# Altium PCB Pulse_WS_MAX30105.PcbDoc
Units mm, origin at the board's own origin, x right, y up, seen from the top; angles counter-clockwise.
Board outline 16.3 x 13 mm, 4 copper layers (Top Layer, Layer 1, Layer 2, Bottom Layer), stack 0.612 mm thick; 9 components, 6 nets, 39 pads, 22 vias.
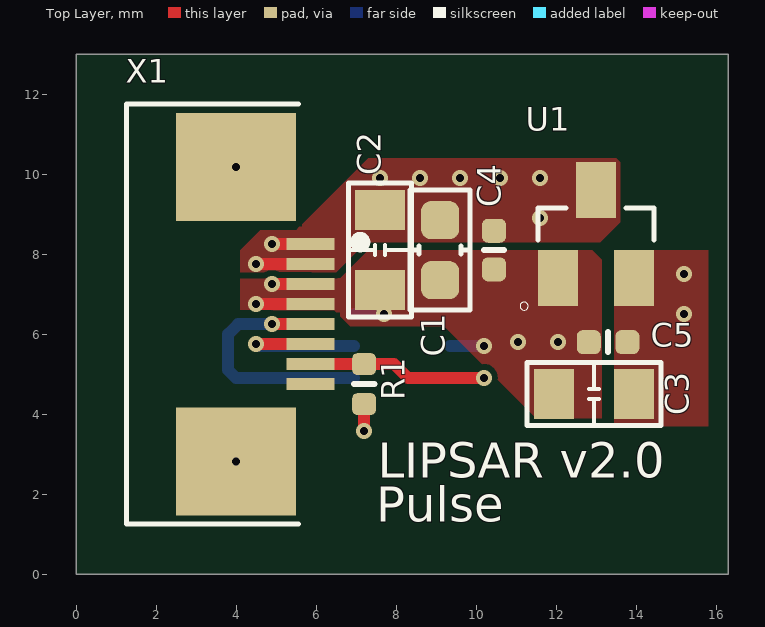
[diagram p0: Top Layer view]
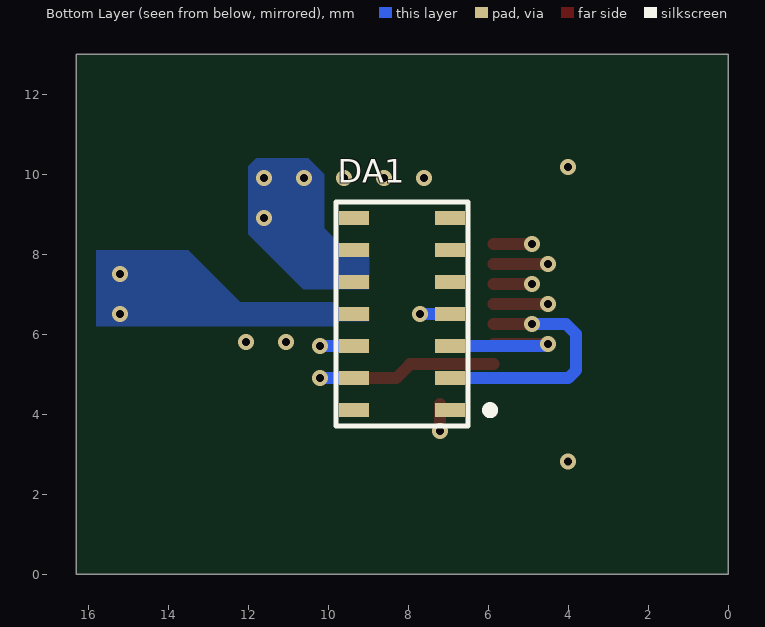
[diagram p1: Bottom Layer view, seen from below]
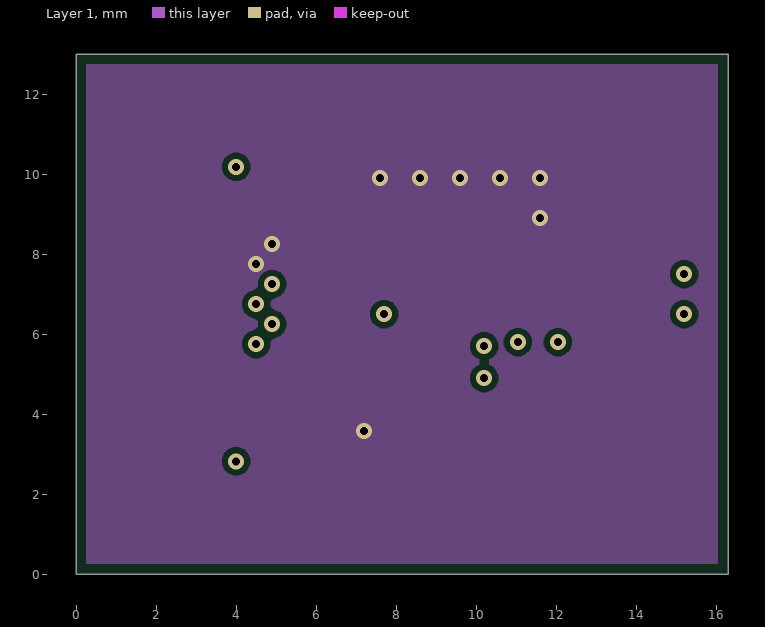
[diagram p2: Layer 1]
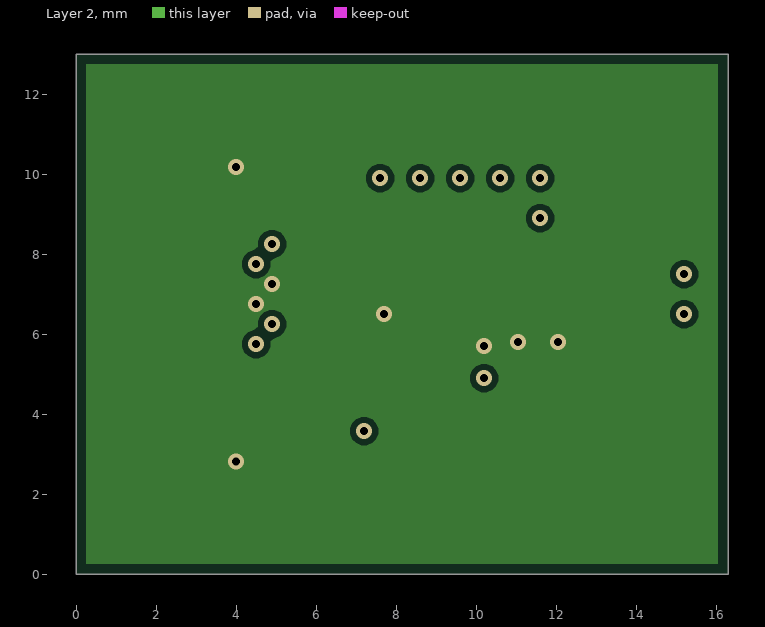
[diagram p3: Layer 2]
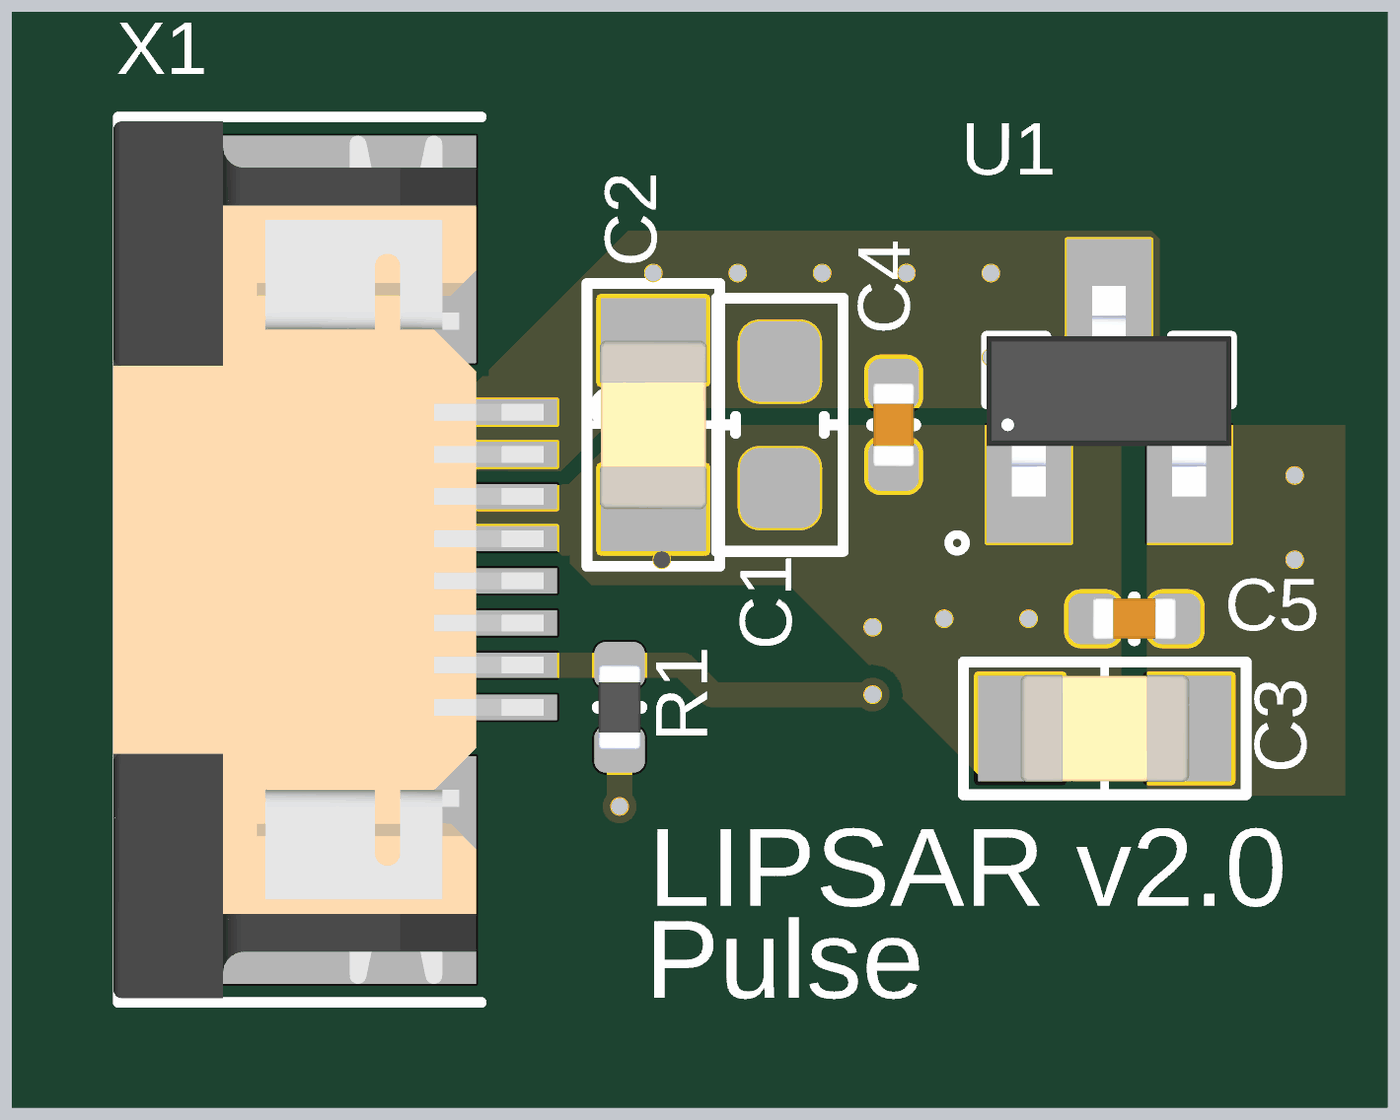
[diagram p4: 3D render of the assembled board from above, using the file's embedded part models]

## Layer stack, top to bottom
Top Solder: solder mask 0.0102, Solder Resist, Dk 3.5
Top Layer: signal copper 0.018
Dielectric 2: prepreg 0.125, FR4_HiTg170 PR, Dk 5.07
Layer 1: signal copper 0.018
Dielectric 1: core 0.29, FR4 HiTg170, Dk 4.5
Layer 2: signal copper 0.018
Dielectric 3: prepreg 0.125, FR4_HiTg170 PR, Dk 5.07
Bottom Layer: signal copper 0.018
Bottom Solder: solder mask 0.0102, Solder Resist, Dk 3.5

## Board outline
0,0 0,13 16.3,13 16.3,0

## Design rules (kind name [scope] priority, off if disabled: settings)
AcuteAngle [All] p1: minimum=3.50000000000000E+0001 checktracksonly=FALSE
BoardOutlineClearance "BoardOutlineClearance 1" [All] p1: gap=0.25 ignorepadtopadclearanceinfootprint=FALSE except(0: Arc-SplitContinuation Track-SplitContinuation SMDPad-SplitContinuation THPad-SplitContinuation Via-SplitContinuation Fill-SplitContinuation Poly-SplitContinuation Region-SplitContinuation Text-SplitContinuation) // Milling
BoardOutlineClearance "BoardOutlineClearance 2" [All] p2: gap=0.4 ignorepadtopadclearanceinfootprint=FALSE except(0: Arc-SplitContinuation Track-SplitContinuation SMDPad-SplitContinuation THPad-SplitContinuation Via-SplitContinuation Fill-SplitContinuation Poly-SplitContinuation Region-SplitContinuation Text-SplitContinuation) // V-Cut
Clearance "Clearance-2 1/2 Oz" [All] p1: gap=0.1 ignorepadtopadclearanceinfootprint=FALSE except(0.15: Arc-Fill Arc-Poly Track-Fill Track-Poly SMDPad-SMDPad SMDPad-Fill SMDPad-Poly THPad-Fill THPad-Poly Via-Fill Via-Poly Fill-Fill Fill-Poly Poly-Poly Poly-Region Poly-Text; 0.25: Arc-Hole Track-Hole SMDPad-Hole THPad-Hole Via-Hole Fill-Hole Poly-Hole Region-Hole Text-Hole) // Advance
DiffPairsRouting "DiffPairsRouting 1 Oz" [All] p1: maxlimit=0.254 minlimit=0.2 mostfreqgap=0.254 toplayer_minwidth=0.2 toplayer_maxwidth=0.381 toplayer_prefwidth=0.381 midlayer1_minwidth=0.2 midlayer1_maxwidth=0.381 midlayer1_prefwidth=0.381 midlayer2_minwidth=0.2 midlayer2_maxwidth=0.381 midlayer2_prefwidth=0.381 bottomlayer_minwidth=0.2 bottomlayer_maxwidth=0.381 bottomlayer_prefwidth=0.381 maxuncoupledlength=12.7
DiffPairsRouting "DiffPairsRouting 1/2 Oz" [All] p2: maxlimit=0.254 minlimit=0.1 mostfreqgap=0.254 toplayer_minwidth=0.1 toplayer_maxwidth=0.381 toplayer_prefwidth=0.381 midlayer1_minwidth=0.1 midlayer1_maxwidth=0.381 midlayer1_prefwidth=0.381 midlayer2_minwidth=0.1 midlayer2_maxwidth=0.381 midlayer2_prefwidth=0.381 bottomlayer_minwidth=0.1 bottomlayer_maxwidth=0.381 bottomlayer_prefwidth=0.381 maxuncoupledlength=12.7
HoleSize "Minimum HoleSize" [IsPad] p1: absolutevalues=TRUE maxlimit=5.9 minlimit=0.6 maxpercent=80.000 minpercent=20.000
HoleSize "Minimum HoleSize VIA 2" [IsVia] p2: absolutevalues=TRUE maxlimit=5.9 minlimit=0.2 maxpercent=80.000 minpercent=20.000 // Advance
HoleToHoleClearance Hole2HoleClearance [All] p1: gap=0.25 allowstackedmicrovias=FALSE
MinimumAnnularRing "Minimum AR VIA Standart" [IsVia] p1: minimumring=0.1
MinimumAnnularRing "Minimum AR PAD Standart" [IsPAD] p2: minimumring=0.15
MinimumSolderMaskSliver "SolderMask Bridge Advance" [All] p1: minsoldermaskwidth=0.1 // Mask LDI
PlaneClearance "PlaneClearance-2 1/2 Oz" [All] p1: clearance=0.15 // Advance
PlaneConnect "TermalConnect-2 1/2 Oz" [All] p1: planeconnectstyle=Direct reliefexpansion=0.15 reliefentries=4 reliefconductorwidth=0.15 reliefairgap=0.15 // Advance
PolygonConnect "PolygonConnect-2 1/2 Oz" [All] p1: connectstyle=Direct reliefconductorwidth=0.125 reliefentries=4 polygonreliefangle="90 Angle" airgapwidth=0.15 // Advance
RoutingCorners [All] p1 off: cornerstyle=45-Degree minsetback=2.54 maxsetback=2.54
RoutingVias [All] p1: holewidth=0.2 width=0.4 viastyle="Through Hole" minholewidth=0.2 minwidth=0.4 maxholewidth=5.9 maxwidth=6.4
SilkToSilkClearance Silk2SilkClearance [All] p1 off: silktosilkclearance=0.15
SilkToSolderMaskClearance Silk2SolderMaskClearance [IsPad] p1 off: minsilkscreentomaskgap=0.15 clearancetoexposedcopper=TRUE
SolderMaskExpansion SolderMaskExpansion_via [isvia] p1: expansion=0.102 istentingtop=TRUE
SolderMaskExpansion "SolderMaskExpansion LDI" [All] p2: expansion=0.025 istentingtop=FALSE // Advance
UnRoutedNet [All] p1: checkbadconnections=TRUE
Width Width_SPI [InNet('SPI1_CLK') or InNet('SPI1_CS_FLASH')or InNet('SPI1_CS_TFT')or InNet('SPI1_MISO')or InNet('SPI1_MOSI')] p1: maxlimit=0.16 minlimit=0.14 preferedwidth=0.16 toplayer_minwidth=0.16 midlayer1_maxwidth=0.14 midlayer1_prefwidth=0.14 midlayer2_maxwidth=0.14 midlayer2_prefwidth=0.14 bottomlayer_minwidth=0.16 impedanceprofiledriven=TRUE impedanceprofileid={AFAC0996-0EC3-4B63-996B-75656DEA0BB7} minimp=50.000000 maximp=50.000000 favimp=50.000000
Width "Width 1/2 Oz" [All] p2: maxlimit=10 minlimit=0.1 preferedwidth=0.125 checkconnectedcopper=TRUE
20 further rules are at their usual default settings.

## Components (designator, comment, footprint, x,y, rotation, side; value= is the part's Value field where it differs from the comment)
C1 "STD_CAP" CAPC1608X90N 9.1,8.1 r270 top value="1.0 uF"
C2 "STD_CAP" CAPC2012X120N 7.6,8.1 r270 top value="10 uF"
C3 "STD_CAP" CAPC2012X120N 12.95,4.5 r180 top value="4.7 uF"
C4 "STD_CAP" CAPC1005X55N 10.448,8.1 r270 top value="0.10 uF"
C5 "STD_CAP" CAPC1005X55N 13.3,5.8 r180 top value="0.10 uF"
DA1 "MAX30105" MAX30105 8.15,6.5 r0 bottom
R1 "STD_RES" RESC1005X40N 7.2,4.75 r90 top value="4.75 kOm"
U1 "XC6206P182MR" SOT23 13,8.5 r0 top
X1 "FFC 8 pin" 68710814022 4,6.5 r270 top

## Footprints (in the part's own frame and the unit in brackets; to place one, negate y for a bottom-side part, rotate by r counter-clockwise, add the part's x,y. Pads: shape width x height; smd on the part's side, far side on the other; paste and mask are expansions set on the pad)
68710814022 [mm]
  rect 0.3x1.2 smd: 1(-1.75,1.86) 2(-1.25,1.86) 3(-0.75,1.86) 4(-0.25,1.86) 5(0.25,1.86) 6(0.75,1.86) 7(1.25,1.86) 8(1.75,1.86)
  rect 2.7x3 smd: S1(-3.68,0) S2(3.68,0)
  silkscreen extent -5.25,-2.74 5.25,3.23, body extent -5.2,-2.8 5.2,2.3, height 2.05
CAPC1005X55N [mm] "Chip Capacitor, 2-Leads, Body 1,0x0,5mm, IPC Medium Density"
  rrect50% 0.6x0.6 smd mask+0.05: 1(-0.483,0) 2(0.483,0)
  silkscreen extent 0,-0.25 0,0.25, body extent -0.5,-0.25 0.5,0.25, height 0.6
CAPC1608X90N [mm] "Chip Capacitor EIA 0603. METRIC 1608, 2-Leads, Body 1,6x0,8mm, IPC Medium Density"
  rrect50% 0.95x0.95 smd: 1(-0.75,0) 2(0.75,0)
  silkscreen extent -1.5,-0.75 1.5,0.75, body extent -0.8,-0.4 0.8,0.4, height 0.9
CAPC2012X120N [mm] "Chip Capacitor EIA 0805. METRIC 2012, 2-Leads, Body 2,0x1,2mm, IPC Medium Density"
  rect 1x1.25 smd mask+0.051: 1(-1,0) 2(1,0)
  silkscreen extent -1.68,-0.79 1.68,0.79, body extent -1,-0.64 1,0.64, height 0.57
MAX30105 [mm]
  rect 0.75x0.35 smd: 1(-1.2,2.4) 2(-1.2,1.6) 3(-1.2,0.8) 4(-1.2,0) 5(-1.2,-0.8) 6(-1.2,-1.6) 7(-1.2,-2.4) 8(1.2,-2.4) 9(1.2,-1.6) 10(1.2,-0.8) 11(1.2,0) 12(1.2,0.8) 13(1.2,1.6) 14(1.2,2.4)
  silkscreen extent -2.3,-2.8 1.65,2.8, body extent -1.65,-2.8 1.65,2.8, height 1.65
RESC1005X40N [mm] "Chip Resistor EIA 0402. METRIC 1005, 2-Leads, Body 1,0x0,5mm, IPC Medium Density"
  rrect50% 0.55x0.6 smd: 1(-0.5,0) 2(0.5,0)
  silkscreen extent 0,-0.25 0,0.25, body extent -0.5,-0.25 0.5,0.25, height 0.4
SOT23 [mm]
  rect 1x1.4 smd: 1(-0.95,-1.1) 2(0.95,-1.1) 3(0,1.1)
  silkscreen extent -1.9,-1.9 1.45,0.65, body extent -1.45,-1.25 1.45,1.25, height 1.1

## Part data
C1: library part 3936, Dielectric=X7R, Manufacturer=muRata, ManufacturerPartnumber=GRM188R71C105KA12D, Temp_Range="-55 to 125°C", Voltage_Range=16V, BOM="Конденсатор 0603 1.0 uF ±10% 16V X7R    GRM188R71C105KA12D muRata", Comp_Class_Name="Capacitors Chip SMD 0603", Comp_Class_Number=200004, Comp_Description="Capacitors 0603 1.0 uF ±10% 16V X7R", Comp_ID=200004-0109, ComponentLink1Description=MANUFACTURER_URL, ComponentLink1URL=http://www.murata.com/products/catalog/pdf/c02e.pdf, Footprint_Description="Chip Capacitor EIA 0603. METRIC 1608, 2-Leads, Body 1,6x0,8mm, IPC Medium Density", HelpURL=\\corp1\RNDlibrary\_Library\Altium_lib\Datasheet\muRata\Chip_Monolithic_Ceramic_Capacitors\Chip_Monolithic_Ceramic_Capacitors.pdf, Human_Readable="Конденсатор 0603 1.0 uF ±10% 16V X7R", Lib_Description=Capacitor, Number_Base=3936, Precision=±10%, Price=0,0799999982118607, TimeModification_Comp="06.12.2011 14:46:17"
C2: library part 4014, Dielectric=X7R, Manufacturer=muRata, ManufacturerPartnumber=GRM21BR71A106KE51L, Temp_Range="-55 to 125°C", Voltage_Range=10V, BOM="Конденсатор 0805 10 uF ±10% 10V X7R    GRM21BR71A106KE51L muRata", Comp_Class_Name="Capacitors Chip SMD 0805", Comp_Class_Number=200005, Comp_Description="Capacitors 0805 10 uF ±10% 10V X7R", Comp_ID=200005-0069, ComponentLink1Description=MANUFACTURER_URL, ComponentLink1URL=http://www.murata.com/products/catalog/pdf/c02e.pdf, Footprint_Description="Chip Capacitor EIA 0805. METRIC 2012, 2-Leads, Body 2,0x1,2mm, IPC Medium Density", HelpURL=\\corp1\RNDlibrary\_Library\Altium_lib\Datasheet\muRata\Chip_Monolithic_Ceramic_Capacitors\Chip_Monolithic_Ceramic_Capacitors.pdf, Human_Readable="Конденсатор 0805 10 uF ±10% 10V X7R", Lib_Description=Capacitor, Number_Base=4014, Precision=±10%, TimeModification_Comp="07.12.2011 12:55:51"
C3: library part 4013, Dielectric=X7R, Manufacturer=muRata, ManufacturerPartnumber=GRM21BR71A475KA73L, Temp_Range="-55 to 125°C", Voltage_Range=10V, BOM="Конденсатор 0805 4.7 uF ±10% 10V X7R    GRM21BR71A475KA73L muRata", Comp_Class_Name="Capacitors Chip SMD 0805", Comp_Class_Number=200005, Comp_Description="Capacitors 0805 4.7 uF ±10% 10V X7R", Comp_ID=200005-0068, ComponentLink1Description=MANUFACTURER_URL, ComponentLink1URL=http://www.murata.com/products/catalog/pdf/c02e.pdf, Footprint_Description="Chip Capacitor EIA 0805. METRIC 2012, 2-Leads, Body 2,0x1,2mm, IPC Medium Density", HelpURL=\\corp1\RNDlibrary\_Library\Altium_lib\Datasheet\muRata\Chip_Monolithic_Ceramic_Capacitors\Chip_Monolithic_Ceramic_Capacitors.pdf, Human_Readable="Конденсатор 0805 4.7 uF ±10% 10V X7R", Lib_Description=Capacitor, Number_Base=4013, Precision=±10%, TimeModification_Comp="07.12.2011 12:55:51"
C4 C5: library part 3823, Dielectric=X7R, Manufacturer=muRata, ManufacturerPartnumber=GRM155R71C104KA88D, Temp_Range="-55 to 125°C", Voltage_Range=16V, AuthorModification_Comp=anosova, BOM="Конденсатор 0402 0.10 uF ±10% 16V X7R    GRM155R71C104KA88D muRata", Comp_Class_Name="Capacitors Chip SMD 0402", Comp_Class_Number=200003, Comp_Description="Capacitors 0402 0.10 uF ±10% 16V X7R", Comp_ID=200003-0422, ComponentLink1Description=MANUFACTURER_URL, ComponentLink1URL=http://www.murata.com/products/catalog/pdf/c02e.pdf, Footprint_Description="Chip Capacitor EIA 0402. METRIC 1005, 2-Leads, Body 1,00x0,5mm, IPC Medium Density", HelpURL=\\corp1\RNDlibrary\_Library\Altium_lib\Datasheet\muRata\Chip_Monolithic_Ceramic_Capacitors\Chip_Monolithic_Ceramic_Capacitors.pdf, Human_Readable="Конденсатор 0402 0.10 uF ±10% 16V X7R", Lib_Description=Capacitor, Number_Base=3823, Precision=±10%, Price=0,0199999995529652, TimeModification_Comp="18.11.2021 13:09:14"
DA1: Manufacturer=MAX, ManufacturerPartnumber=MPU-9250, BOM="Датчик пульса    MPU-9250 MAX", ComponentLink1Description=Help, ComponentLink1URL="D:\HSE\Трекер физ состояния\Help\MAX30105.pdf", Footprint_Description=Custom, HelpURL="D:\HSE\Трекер физ состояния\Help\MAX30105.pdf", Human_Readable="Датчик пульса"
R1: library part 2904, Manufacturer=Yageo, ManufacturerPartnumber=RC0402FR-074K75L, Power_Range=0.0625W, Temp_Range="-55 °C to +155 °C", BOM="Резистор 0402 1% E96 4,75 кОм    RC0402FR-074K75L Yageo", Comp_Class_Name="Resistors Chip SMD 0402 1% E96", Comp_Class_Number=11010201, Comp_Description="Resistor 0402 1% E96 4.75 kOm", Comp_ID=11010201-354, ComponentLink1Description=MANUFACTURER_URL, ComponentLink1URL=http://www.yageo.com/documents/recent/PYu-RC0402_51_RoHS_L_6.pdf, Footprint_Description="Chip Resistor EIA 0402. METRIC 1005, 2-Leads, Body 1,00x0,5mm, IPC Medium Density", HelpURL=\\corp1\RNDlibrary\_Library\Altium_lib\Datasheet\Yageo\RC0402\PYu-RC0402_51_RoHS_L_6.pdf, Human_Readable="Резистор 0402 1% E96 4,75 кОм", Lib_Description=Resistor, Number_Base=2904, Precision=1%, Price=0,00600000005215406, TimeModification_Comp="06.12.2011 13:34:56"
U1: "LDO 1v8", Manufacturer=UMW, BOM="LDO 1V8    XC6206P182MR UMW", Footprint_Description=SOT23, Human_Readable="LDO 1V8", ManufacturerPartnumber=XC6206P182MR
X1: "FFC connector 8 pin"

## Via types
v1: diameter 0.4, hole 0.2, Top Layer to Bottom Layer, tented both sides, 22 vias

## Nets (pads, with @x,y where several pads share a name; then routed paths per layer and width w, separated by ;. In a path a pad name is that pad's centre, name@x,y a point inside that pad or via, vN(x,y) a via of type N, cw(c..) or ccw(c..) an arc to the next point about the centre after c; other vN are vias at no path point)
3V3: C1.1 C2.1 C4.1 DA1.9 DA1.10 R1.1 U1.3 X1.1 X1.2 | length 3
  Top Layer w0.3: v1(4.5,7.75) X1.2 ; v1(4.9,8.25) X1.1 ; v1(7.2,3.575) R1.1
  other v1: 11.6,8.9 7.6,9.9 8.6,9.9 9.6,9.9 10.6,9.9 11.6,9.9
GND: C1.2 C2.2 C3.2 C4.2 C5.2 DA1.4 DA1.12 U1.1 X1.3 X1.4 X1.S1 X1.S2 | length 3.9
  Top Layer w0.3: v1(4.5,6.75) X1.4 ; v1(4.9,7.25) X1.3
  Bottom Layer w0.3: DA1.4 v1(7.7,6.5) ; DA1.12 v1(10.2,5.7)
  other v1: 4,2.82 11.047,5.8 12.047,5.8 4,10.18
INT_PULSE: DA1.13 R1.2 X1.7 | length 5.3
  Top Layer w0.3: X1.7 R1.2 7.95,5.25 8.3,4.9 v1(10.2,4.9)
  Bottom Layer w0.3: DA1.13 v1(10.2,4.9)
MCU_SCL: DA1.3 X1.6 | length 3.8
  Top Layer w0.3: v1(4.5,5.75) X1.6
  Bottom Layer w0.3: v1(4.5,5.75) 4.527,5.75 4.577,5.7 DA1.3
MCU_SDA: DA1.2 X1.5 | length 6.3
  Top Layer w0.3: v1(4.9,6.25) X1.5
  Bottom Layer w0.3: v1(4.9,6.25) 4.05,6.25 3.8,6 3.8,5.1 4,4.9 DA1.2
NetC3_1: C3.1 C5.1 DA1.11 U1.2
  other v1: 15.2,6.5 15.2,7.5
pads on no net: DA1.1 DA1.5 DA1.6 DA1.7 DA1.8 DA1.14 X1.8

## Polygon pours and split planes (outlines as drawn)
GND on Top Layer (solid, pour order 7): 9.2,6.2 11.5,3.9 13.147,3.9 13.147,7.853 12.9,8.1 7.3,8.1 6.6,7.4 4.1,7.4 4.1,6.604 6.4,6.6 6.46,6.6 6.86,6.2
NetC3_1 on Top Layer "NETC3_1_L01_P004" (solid, pour order 4): 13.45,3.7 13.45,8.1 15.8,8.1 15.8,3.7
3V3 on Top Layer "3V3_L01_P003" (solid, pour order 3): 4.1,7.547 6.506,7.547 7.259,8.3 13.1,8.3 13.6,8.8 13.6,10.3 13.5,10.4 7.3,10.4 5.5,8.6 4.6,8.6 4.1,8.1
NetC3_1 on Bottom Layer "NETC3_1_L04_P005" (solid, pour order 5): 8.975,6.675 8.975,6.325 9.725,6.325 9.85,6.2 15.8,6.2 15.8,8.1 13.5,8.1 12.2,6.8 9.85,6.8 9.725,6.675
3V3 on Bottom Layer "3V3_L04_P008" (solid, pour order 8): 8.975,8.275 9.725,8.275 10.1,8.65 10.1,10 10.5,10.4 11.8,10.4 12,10.2 12,8.5 10.625,7.125 8.975,7.125
GND on Layer 2 "GND_L03_P000" (solid, pour order 0): 0,13 0,0 16.3,0 16.3,13
3V3 on Layer 1 "3V3_L02_P001" (solid, pour order 1): 0,13 0,0 16.3,0 16.3,13

## Other copper
Top Layer:
  pour cut-out: 8.8,6.6

## Silkscreen, mask and mechanical layers (free items; w line width, h text height)
Top Overlay:
  text "LIPSAR v2.0" at 7.539,2.119 h1.5
  text "Pulse" at 7.501,1.027 h1.5
Board:
  the board outline again, w0.127